# Altium PCB controller_V1.0.PcbDoc (part 5 of 8)
Units mm, origin at the board's own origin, x right, y up, seen from the top; angles counter-clockwise.
Board outline 284.13 x 175.13 mm, 4 copper layers (Top Layer, GND, VCC, Bottom Layer); 496 components, 415 nets, 1682 pads, 750 vias.
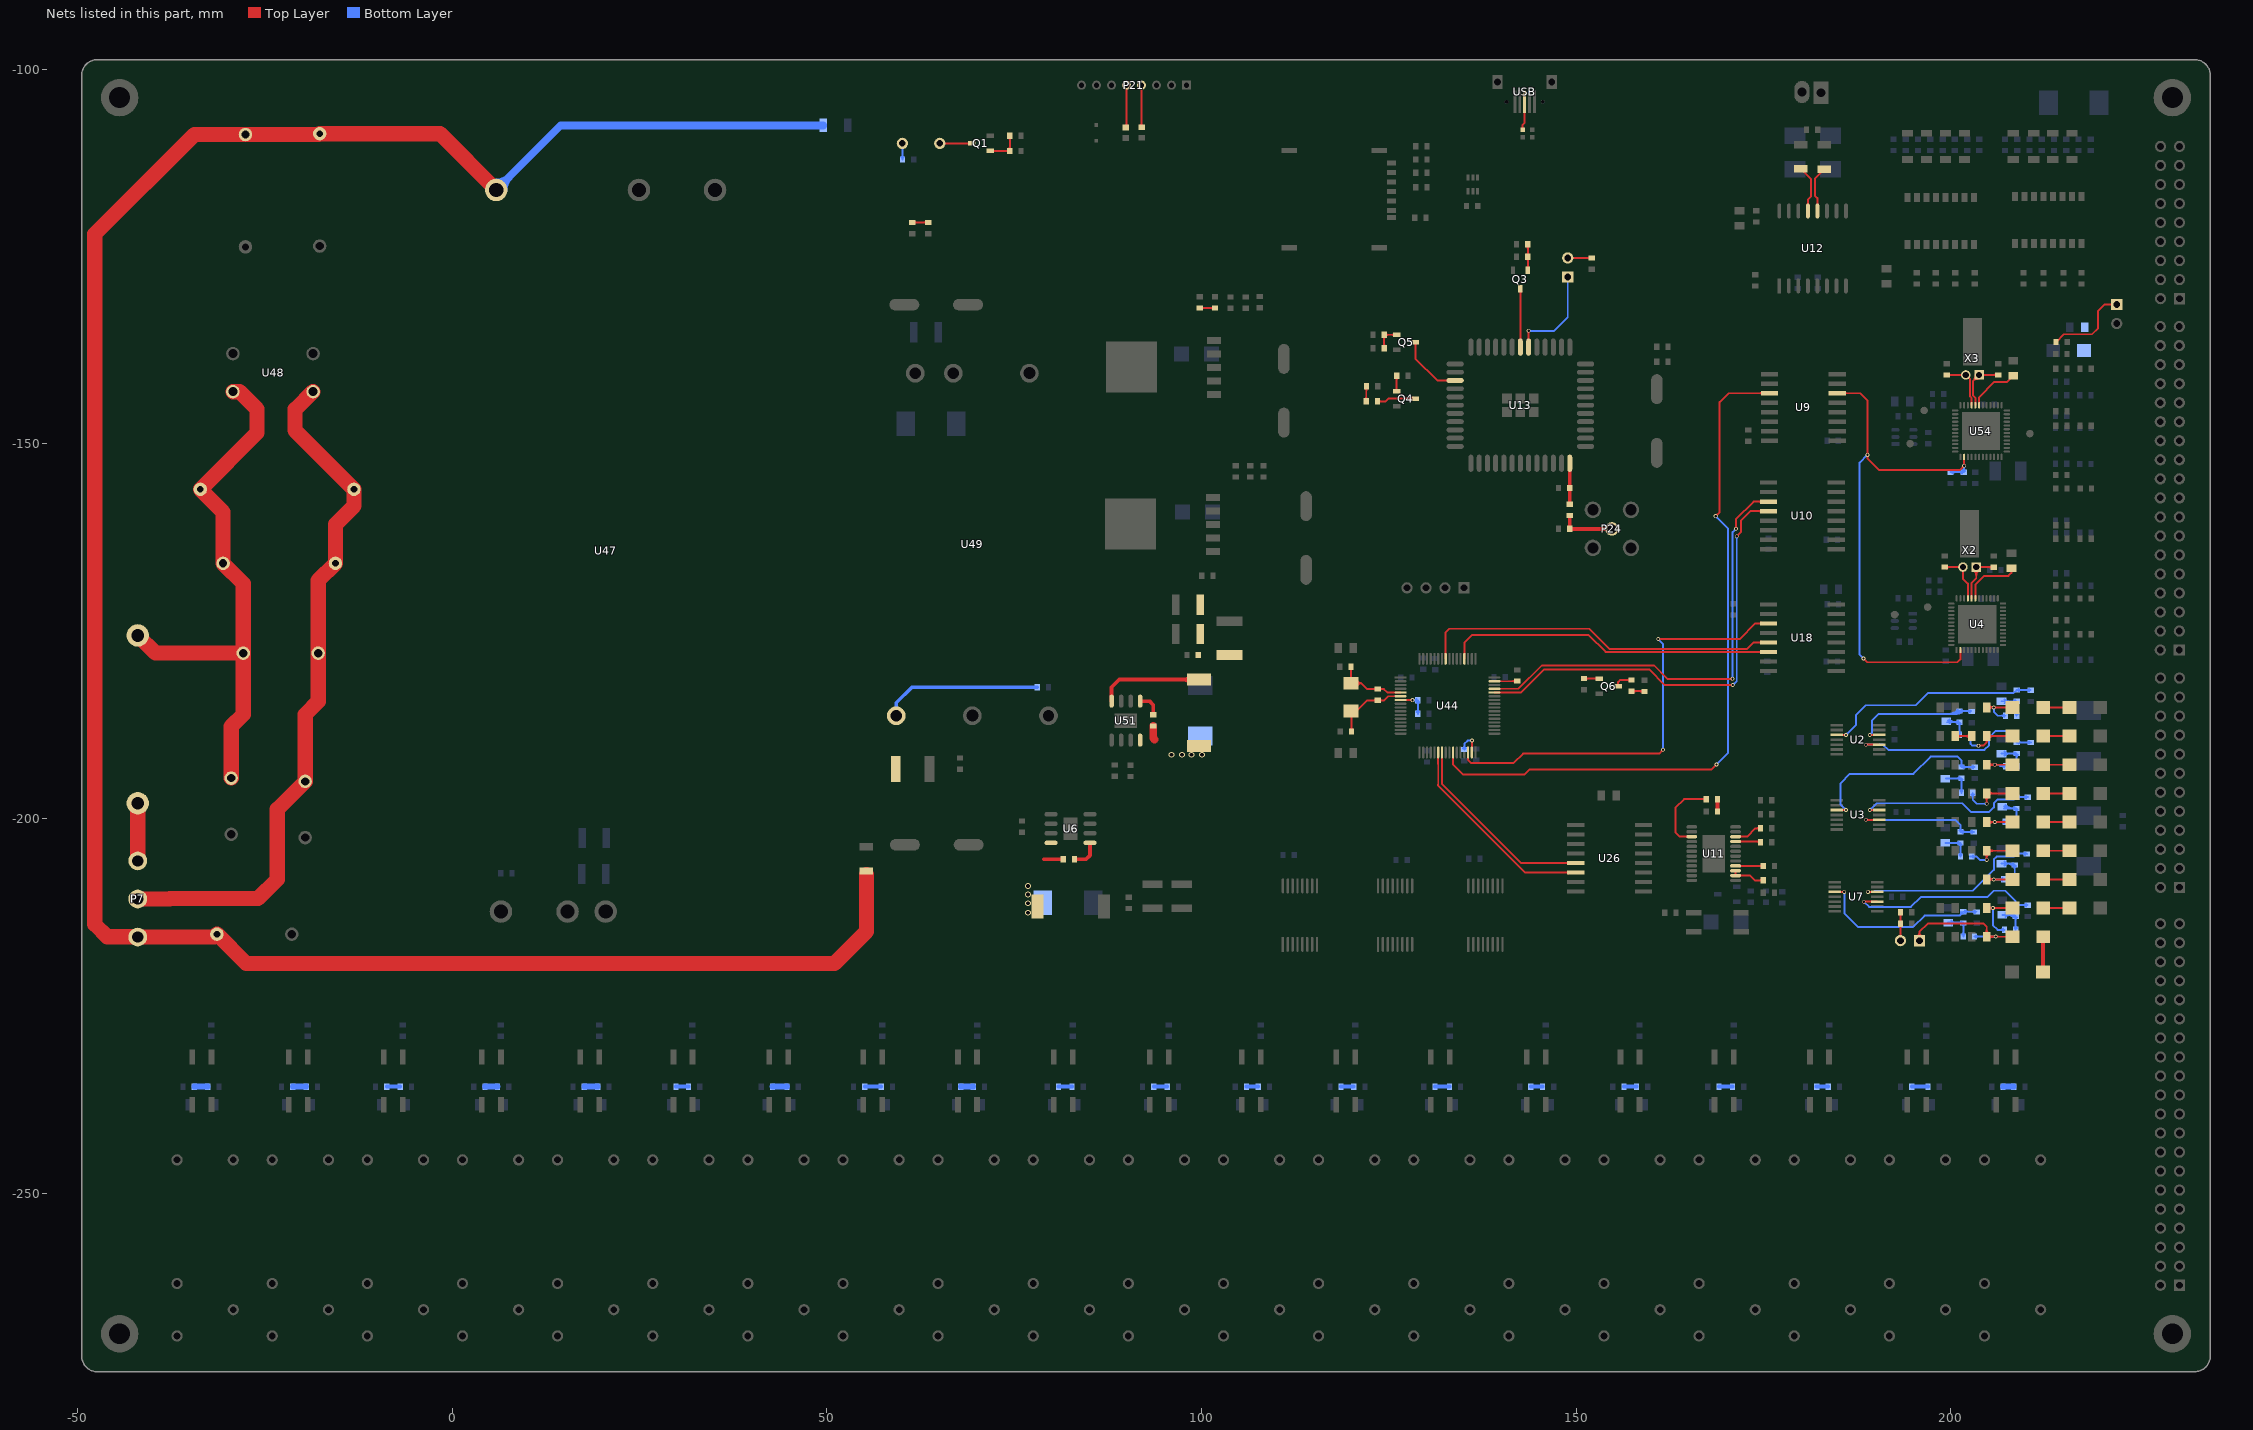
[diagram p7: the nets of this part, all layers, seen from the top]

## Via types
v1: diameter 0.508, hole 0.305, Top Layer to Bottom Layer, tented both sides, 596 vias
v2: diameter 1.016, hole 0.635, Top Layer to Bottom Layer, tented both sides, 65 vias
v3: diameter 0.6, hole 0.3, Top Layer to Bottom Layer, 50 vias
v4: diameter 0.762, hole 0.508, Top Layer to Bottom Layer, tented both sides, 29 vias
v5: diameter 2.032, hole 1.524, Top Layer to Bottom Layer, tented both sides, 4 vias
v6: diameter 3.048, hole 2.032, Top Layer to Bottom Layer, tented both sides, 3 vias
v7: diameter 1.5, hole 1, Top Layer to Bottom Layer, 2 vias
v8: diameter 2.54, hole 1.778, Top Layer to Bottom Layer, tented both sides, 1 vias

## Nets (pads, with @x,y where several pads share a name; then routed paths per layer and width w, separated by ;. In a path a pad name is that pad's centre, name@x,y a point inside that pad or via, vN(x,y) a via of type N, cw(c..) or ccw(c..) an arc to the next point about the centre after c; other vN are vias at no path point) (continued)
MIBSPI1MCS1: U18.3 U44.30 | length 61.1
  Top Layer w0.254: U44.30@135.591,-191.178 135.591,-192.208 135.966,-192.583 141.676,-192.583 142.92,-191.338 161.087,-191.338 v1(161.595,-190.83) ; v1(160.96,-176.047) 171.856,-176.047 173.939,-173.965 U18.3@175.689,-173.965 ; v1@161.05,-176.137 cw(c161.266,-176.354) 161.266,-176.047 cw(c161.266,-175.741) v1@161.05,-175.958 ; v1@161.468,-190.83 cw(c161.161,-190.83) 161.378,-191.047 cw(c161.595,-191.264) v1@161.595,-190.957 ; U18.3@174.705,-174.072 ccw(c174.445,-174.333) 174.445,-173.965 ccw(c174.445,-173.597) U18.3@174.705,-173.857
  Bottom Layer w0.254: v1@160.96,-176.174 cw(c160.96,-176.481) 161.177,-176.264 cw(c161.393,-176.047) v1@161.087,-176.047 ; v1(160.96,-176.047) 161.595,-176.682 v1(161.595,-190.83) ; v1@161.505,-190.74 ccw(c161.288,-190.524) 161.595,-190.524 ccw(c161.901,-190.524) v1@161.685,-190.74
MIBSPI1MCS2: U10.3 U44.45 | length 63.1
  Top Layer w0.254: U44.45@139.091,-182.678 142.315,-182.678 145.415,-179.578 159.283,-179.578 160.426,-179.578 162.204,-181.356 v1(170.891,-181.356) ; v1@170.801,-181.446 ccw(c170.585,-181.663) 170.585,-181.356 ccw(c170.585,-181.049) v1@170.801,-181.266 ; v1@171.259,-161.226 ccw(c171.042,-161.009) 171.348,-161.009 ccw(c171.655,-161.009) v1@171.438,-161.226 ; v1(171.348,-161.315) 171.348,-160.071 173.711,-157.709 U10.3@175.689,-157.709 ; U10.3@174.705,-157.816 ccw(c174.445,-158.077) 174.445,-157.709 ccw(c174.445,-157.341) U10.3@174.705,-157.601
  Bottom Layer w0.254: v1@170.801,-181.266 ccw(c170.585,-181.049) 170.891,-181.049 ccw(c171.198,-181.049) v1@170.981,-181.266 ; v1(170.891,-181.356) 170.891,-161.773 v1(171.348,-161.315) ; v1@171.221,-161.315 cw(c170.915,-161.315) 171.132,-161.532 cw(c171.348,-161.749) v1@171.348,-161.442
MIBSPI1MCS3: U10.4 U44.44 | length 63.1
  Top Layer w0.254: U44.44@139.091,-183.178 142.678,-183.178 145.771,-180.086 159.156,-180.086 159.741,-180.086 161.849,-182.194 v1(170.917,-182.194) ; v1@170.827,-182.284 ccw(c170.61,-182.501) 170.61,-182.194 ccw(c170.61,-181.888) v1@170.827,-182.104 ; v1(171.45,-162.331) 172.009,-161.773 172.009,-160.223 173.253,-158.979 U10.4@175.689,-158.979 ; v1@171.45,-162.204 ccw(c171.45,-161.898) 171.667,-162.115 ccw(c171.884,-162.331) v1@171.577,-162.331 ; U10.4@174.705,-159.086 ccw(c174.445,-159.347) 174.445,-158.979 ccw(c174.445,-158.611) U10.4@174.705,-158.871
  Bottom Layer w0.254: v1(170.917,-182.194) 171.45,-181.661 v1(171.45,-162.331) ; v1@170.917,-182.067 ccw(c170.917,-181.761) 171.133,-181.977 ccw(c171.35,-182.194) v1@171.044,-182.194 ; v1@171.36,-162.421 cw(c171.143,-162.638) 171.45,-162.638 cw(c171.757,-162.638) v1@171.54,-162.421
MIBSPI1SIMO: U18.5 U44.57 | length 48.9
  Top Layer w0.254: U44.57@132.591,-178.678 132.591,-175.638 132.591,-175.155 133.071,-174.676 151.765,-174.676 154.457,-177.368 172.822,-177.368 173.66,-176.53 ; 173.66,-176.505 U18.5@175.689,-176.505 ; U18.5@174.705,-176.612 ccw(c174.445,-176.873) 174.445,-176.505 ccw(c174.445,-176.137) U18.5@174.705,-176.397
MIBSPI1SOMI: U18.6 U44.52 | length 44.7
  Top Layer w0.254: U44.52@135.091,-178.678 135.091,-176.516 136.093,-175.514 151.689,-175.514 153.949,-177.775 161.874,-177.775 U18.6@175.689,-177.775 ; U18.6@174.705,-177.882 ccw(c174.445,-178.143) 174.445,-177.775 ccw(c174.445,-177.407) U18.6@174.705,-177.667
MISO_AO_MCU: U26.6 U44.22 | length 28.2
  Top Layer w0.254: U44.22@131.591,-191.178 131.591,-192.71 131.599,-192.718 131.599,-195.441 131.591,-195.449 131.591,-195.599 143.205,-207.213 U26.6@149.959,-207.213 ; U26.6@148.975,-207.321 ccw(c148.715,-207.581) 148.715,-207.213 ccw(c148.715,-206.845) U26.6@148.975,-207.105
MOSI_AO_MCU: U26.5 U44.23 | length 27
  Top Layer w0.254: U44.23@132.091,-191.178 132.091,-195.362 142.672,-205.943 145.669,-205.943 U26.5@149.959,-205.943 ; U26.5@148.975,-206.051 ccw(c148.715,-206.311) 148.715,-205.943 ccw(c148.715,-205.575) U26.5@148.975,-205.835
MSR0: D12.2 R7.2 R80.2 | length 9.5
  Top Layer w0.254: R80.2@204.816,-185.174 v1(205.765,-185.174) D12.2@208.259,-185.174 ; R80.2@205.08,-185.438 cw(c205.717,-186.075) 205.717,-185.174 cw(c205.717,-184.274) R80.2@205.08,-184.911 ; v1@205.676,-185.264 ccw(c205.459,-185.481) 205.459,-185.174 ccw(c205.459,-184.868) v1@205.676,-185.085 ; v1@205.855,-185.264 cw(c206.072,-185.481) 206.072,-185.174 cw(c206.072,-184.868) v1@205.855,-185.085
  Bottom Layer w0.254: v1@205.676,-185.264 cw(c205.459,-185.481) 205.765,-185.481 cw(c206.072,-185.481) v1@205.855,-185.264 ; v1(205.765,-185.174) 205.765,-185.776 206.273,-186.284 R7.2@207.313,-186.284 ; R7.2@207.156,-186.441 ccw(c206.775,-186.822) 206.775,-186.284 ccw(c206.775,-185.745) R7.2@207.156,-186.126
MSR1: D3.2 R5.2 R29.2 | length 12
  Top Layer w0.254: v1@203.606,-190.281 v1(203.733,-190.281) 204.368,-190.281 204.816,-189.833 ; v1@203.823,-190.37 cw(c204.04,-190.587) 204.04,-190.281 cw(c204.04,-189.974) v1@203.823,-190.191 ; R5.2@204.615,-189.464 cw(c204.379,-189.833) 204.816,-189.833 ; R5.2@205.018,-189.464 ccw(c205.254,-189.833) 204.816,-189.833 ; R5.2@205.08,-189.264 cw(c205.717,-189.901) 205.717,-189 cw(c205.717,-188.1) R5.2@205.08,-188.737 ; D3.2@208.259,-189 R5.2@204.816,-189 204.816,-189.833
  Bottom Layer w0.254: R29.2@202.536,-189.056 cw(c202.223,-189.369) 202.665,-189.369 ; 202.665,-189.505 cw(c203.299,-189.505) R29.2@202.851,-189.056 ; R29.2@202.665,-188.984 202.665,-190.042 202.904,-190.281 v1(203.733,-190.281) ; v1@203.644,-190.37 ccw(c203.427,-190.587) 203.427,-190.281 ccw(c203.427,-189.974) v1@203.644,-190.191
MSR2: D6.2 R1.2 R11.2 | length 8.6
  Top Layer w0.254: R11.2@204.816,-192.826 v1(205.892,-192.826) D6.2@208.259,-192.826 ; R11.2@205.08,-193.09 cw(c205.717,-193.727) 205.717,-192.826 cw(c205.717,-191.926) R11.2@205.08,-192.562 ; v1@205.803,-192.916 ccw(c205.586,-193.133) 205.586,-192.826 ccw(c205.586,-192.52) v1@205.803,-192.736 ; v1@205.982,-192.916 cw(c206.199,-193.133) 206.199,-192.826 cw(c206.199,-192.52) v1@205.982,-192.736
  Bottom Layer w0.254: v1(205.892,-192.826) 206.466,-192.826 206.654,-193.015 R1.2@207.313,-193.015 ; v1@205.982,-192.916 cw(c206.199,-193.133) 206.199,-192.826 cw(c206.199,-192.52) v1@205.982,-192.736 ; R1.2@207.156,-193.172 ccw(c206.775,-193.553) 206.775,-193.015 ccw(c206.775,-192.476) R1.2@207.156,-192.857
MSR3: D9.2 R13.2 R44.2 | length 12.5
  Top Layer w0.254: R13.2@204.553,-197.066 cw(c203.916,-197.703) 204.816,-197.703 cw(c205.717,-197.703) R13.2@205.08,-197.066 ; v1@204.727,-197.938 ccw(c204.51,-197.721) 204.816,-197.721 ccw(c205.123,-197.721) v1@204.906,-197.938 ; v1(204.816,-198.028) R13.2@204.816,-196.652 D9.2@208.259,-196.652 ; R13.2@205.08,-196.916 cw(c205.717,-197.553) 205.717,-196.652 cw(c205.717,-195.752) R13.2@205.08,-196.388
  Bottom Layer w0.254: R44.2@202.79,-196.803 cw(c202.409,-197.184) 202.947,-197.184 cw(c203.486,-197.184) R44.2@203.105,-196.803 ; R44.2@202.947,-196.571 202.947,-197.496 203.479,-198.028 v1(204.816,-198.028) ; v1@204.727,-198.117 ccw(c204.51,-198.334) 204.51,-198.028 ccw(c204.51,-197.721) v1@204.727,-197.938
MSR4: D11.2 R3.2 R17.2 | length 8.6
  Top Layer w0.254: R17.2@204.816,-200.478 v1(205.892,-200.478) D11.2@208.259,-200.478 ; R17.2@205.08,-200.742 cw(c205.717,-201.378) 205.717,-200.478 cw(c205.717,-199.577) R17.2@205.08,-200.214 ; v1@205.803,-200.568 ccw(c205.586,-200.785) 205.586,-200.478 ccw(c205.586,-200.171) v1@205.803,-200.388 ; v1@205.982,-200.568 cw(c206.199,-200.785) 206.199,-200.478 cw(c206.199,-200.171) v1@205.982,-200.388
  Bottom Layer w0.254: v1(205.892,-200.478) 207.222,-200.478 R3.2@207.285,-200.414 ; v1@205.982,-200.568 cw(c206.199,-200.785) 206.199,-200.478 cw(c206.199,-200.171) v1@205.982,-200.388 ; 206.719,-200.478 cw(c206.719,-201.056) R3.2@207.128,-200.647 ; 206.775,-200.478 ccw(c206.775,-199.979) R3.2@207.128,-200.332
MSR5: D14.2 R25.2 R27.2 | length 11.7
  Top Layer w0.254: R27.2@204.553,-204.718 cw(c203.916,-205.354) 204.816,-205.354 cw(c205.717,-205.354) R27.2@205.08,-204.718 ; v1@204.727,-205.431 ccw(c204.51,-205.214) 204.816,-205.214 ccw(c205.123,-205.214) v1@204.906,-205.431 ; v1(204.816,-205.521) R27.2@204.816,-204.304 D14.2@208.259,-204.304 ; R27.2@205.08,-204.568 cw(c205.717,-205.204) 205.717,-204.304 cw(c205.717,-203.403) R27.2@205.08,-204.04
  Bottom Layer w0.254: R25.2@202.566,-205.08 R25.2@202.82,-205.08 203.479,-205.08 203.92,-205.521 v1(204.816,-205.521) ; R25.2@202.978,-205.237 cw(c203.359,-205.618) 203.359,-205.08 cw(c203.359,-204.541) R25.2@202.978,-204.922 ; v1@204.727,-205.61 ccw(c204.51,-205.827) 204.51,-205.521 ccw(c204.51,-205.214) v1@204.727,-205.431
MSR6: D17.2 R32.2 R60.2 | length 8.4
  Top Layer w0.254: R32.2@204.816,-208.13 v1(205.765,-208.13) D17.2@208.259,-208.13 ; R32.2@205.08,-208.393 cw(c205.717,-209.03) 205.717,-208.13 cw(c205.717,-207.229) R32.2@205.08,-207.866 ; v1@205.676,-208.219 ccw(c205.459,-208.436) 205.459,-208.13 ccw(c205.459,-207.823) v1@205.676,-208.04 ; v1@205.855,-208.219 cw(c206.072,-208.436) 206.072,-208.13 cw(c206.072,-207.823) v1@205.855,-208.04
  Bottom Layer w0.254: v1@205.767,-208.128 R60.2@207.059,-208.128 ; v1@205.855,-208.219 cw(c206.077,-208.441) 206.077,-208.128 ; v1@205.855,-208.04 ccw(c206.067,-207.828) 206.067,-208.128 ; R60.2@206.902,-208.285 ccw(c206.521,-208.666) 206.521,-208.128 ccw(c206.521,-207.589) R60.2@206.902,-207.97
MSR7: D19.2 R34.2 R46.2 | length 11
  Top Layer w0.254: R34.2@204.816,-211.956 v1(205.638,-211.956) ; R34.2@205.097,-212.201 cw(c205.638,-212.675) v1(205.638,-211.956) ; R34.2@205.097,-211.71 ccw(c205.638,-211.236) v1(205.638,-211.956) ; v1@205.549,-212.045 ccw(c205.332,-212.262) 205.332,-211.956 ccw(c205.332,-211.649) v1@205.549,-211.866 ; v1@205.728,-212.045 cw(c205.945,-212.262) 205.945,-211.956 cw(c205.945,-211.649) v1@205.728,-211.866 ; D19.2@208.259,-211.956 v1(205.638,-211.956)
  Bottom Layer w0.254: v1@205.549,-212.045 cw(c205.332,-212.262) 205.638,-212.262 cw(c205.945,-212.262) v1@205.728,-212.045 ; v1(205.638,-211.956) 205.638,-214.224 206.273,-214.859 R46.2@207.186,-214.859 ; R46.2@207.029,-215.016 ccw(c206.648,-215.397) 206.648,-214.859 ccw(c206.648,-214.32) R46.2@207.029,-214.701
MSR8: D21.2 P2.1 R36.2 R62.2 | length 24.7
  Top Layer w0.254: P2.1@195.487,-215.789 ccw(c195.05,-215.138) 195.834,-215.138 ; P2.1@195.834,-216.306 195.834,-215.138 ; P2.1@196.181,-215.789 cw(c196.618,-215.138) 195.834,-215.138 ; R36.2@204.553,-215.368 ccw(c203.916,-214.731) 204.816,-214.731 ccw(c205.717,-214.731) R36.2@205.08,-215.368 ; R36.2@205.08,-216.045 cw(c205.717,-216.682) 205.717,-215.781 cw(c205.717,-214.881) R36.2@205.08,-215.518 ; 205.631,-215.781 ccw(c205.631,-215.359) v1@205.93,-215.658 ; v1@206.109,-215.658 ccw(c206.408,-215.359) 206.408,-215.781 ; D21.2@208.259,-215.781 R36.2@204.816,-215.781 204.816,-214.443 204.394,-214.02 196.952,-214.02 195.834,-215.138
  Bottom Layer w0.254: R62.2@203.201,-215.748 v1(206.019,-215.748) ; R62.2@203.359,-215.905 cw(c203.74,-216.286) 203.74,-215.748 cw(c203.74,-215.209) R62.2@203.359,-215.59 ; v1@205.93,-215.837 ccw(c205.713,-216.054) 205.713,-215.748 ccw(c205.713,-215.441) v1@205.93,-215.658
MSTART: R19.2 R189.2 U4.26 U9.6 U54.26 | length 79
  Top Layer w0.254: U9.6@184.859,-143.231 187.935,-143.231 188.9,-144.196 v1(188.9,-151.46) ; U9.6@185.843,-143.338 cw(c186.103,-143.599) 186.103,-143.231 cw(c186.103,-142.863) U9.6@185.843,-143.123 ; v1@188.366,-178.765 cw(c188.366,-179.072) 188.583,-178.855 cw(c188.8,-178.638) v1@188.493,-178.638 ; v1(188.366,-178.638) 188.874,-179.146 200.914,-179.146 201.295,-178.765 U4.26@201.295,-177.516 ; v1@188.81,-151.55 cw(c188.593,-151.767) 188.9,-151.767 cw(c189.206,-151.767) v1@188.99,-151.55 ; v1@188.81,-151.37 ccw(c188.593,-151.154) 188.9,-151.154 ccw(c189.206,-151.154) v1@188.99,-151.37 ; v1@188.925,-151.46 v1(188.9,-151.46) ; v1@201.676,-152.908 cw(c201.369,-152.908) 201.586,-153.125 cw(c201.803,-153.342) v1@201.803,-153.035 ; v1@201.713,-152.818 ccw(c201.496,-152.601) 201.803,-152.601 ccw(c202.11,-152.601) v1@201.893,-152.818 ; U54.26@201.803,-151.735 v1(201.803,-152.908) 201.219,-153.492 190.475,-153.492 188.9,-151.917 v1(188.9,-151.46)
  Bottom Layer w0.254: v1@188.239,-178.638 ccw(c187.933,-178.638) 188.15,-178.421 ccw(c188.366,-178.205) v1@188.366,-178.511 ; v1(188.366,-178.638) 187.858,-178.13 187.858,-152.502 v1(188.9,-151.46) ; v1@188.773,-151.46 cw(c188.466,-151.46) 188.683,-151.677 cw(c188.9,-151.894) v1@188.9,-151.587 ; R189.2@199.989,-153.77 R19.2@201.767,-153.77 v1@201.767,-152.944 ; R189.2@200.222,-153.928 cw(c200.602,-154.309) 200.602,-153.77 cw(c200.602,-153.232) R189.2@200.222,-153.613 ; R19.2@201.534,-153.928 ccw(c201.154,-154.309) 201.154,-153.77 ccw(c201.154,-153.232) R19.2@201.534,-153.613 ; R19.2@201.609,-153.613 ccw(c201.229,-153.232) 201.767,-153.232 ccw(c202.305,-153.232) R19.2@201.925,-153.613 ; 201.767,-153.302 cw(c202.197,-153.302) v1@201.893,-152.998
MSTART_MCU: U9.11 U44.26 | length 100.6
  Top Layer w0.254: U44.26@133.591,-191.178 133.591,-192.824 134.874,-194.107 143.154,-194.107 143.815,-193.446 161.417,-193.446 ; 163.347,-193.446 161.417,-193.446 ; 167.742,-193.446 166.548,-193.446 ; v1@168.631,-192.786 cw(c168.324,-192.786) 168.541,-193.003 cw(c168.758,-193.22) v1@168.758,-192.913 ; v1(168.631,-159.639) 169.164,-159.106 169.164,-144.424 170.358,-143.231 U9.11@175.816,-143.231 ; v1@168.631,-159.512 ccw(c168.631,-159.205) 168.847,-159.422 ccw(c169.064,-159.639) v1@168.758,-159.639 ; v1(168.758,-192.786) 168.097,-193.446 166.548,-193.446 ; U9.11@174.832,-143.338 ccw(c174.572,-143.599) 174.572,-143.231 ccw(c174.572,-142.863) U9.11@174.832,-143.123 ; 161.417,-193.446 166.548,-193.446
  Bottom Layer w0.254: v1@168.631,-159.766 cw(c168.631,-160.073) 168.847,-159.856 cw(c169.064,-159.639) v1@168.758,-159.639 ; v1(168.631,-159.639) 170.307,-161.315 170.307,-191.237 v1(168.758,-192.786) ; v1@168.758,-192.659 ccw(c168.758,-192.352) 168.974,-192.569 ccw(c169.191,-192.786) v1@168.885,-192.786
NetC3_1: C3.1 R1.1 R2.2 | length 7.7
  Bottom Layer w0.254: C3.1@206.788,-191.34 R2.2@208.813,-191.34 R1.1@208.813,-193.015 ; C3.1@207.195,-191.61 cw(c207.849,-192.264) 207.849,-191.34 ; C3.1@207.195,-191.083 ccw(c207.815,-190.463) 207.815,-191.34 ; R2.2@208.581,-191.497 ccw(c208.2,-191.878) 208.2,-191.34 ccw(c208.2,-190.801) R2.2@208.581,-191.182 ; R1.1@208.656,-192.782 ccw(c208.275,-192.401) 208.813,-192.401 ccw(c209.352,-192.401) R1.1@208.971,-192.782 ; R2.2@208.656,-191.497 cw(c208.275,-191.878) 208.813,-191.878 cw(c209.352,-191.878) R2.2@208.971,-191.497
NetC4_1: C4.1 R3.1 R4.2 | length 8
  Bottom Layer w0.254: C4.1@207.106,-198.65 R4.2@208.785,-198.65 R3.1@208.785,-200.414 ; C4.1@207.14,-198.366 ccw(c207.826,-197.68) 207.826,-198.65 ; C4.1@207.32,-198.186 ccw(c208.439,-197.067) R4.2@208.439,-198.65 ; R4.2@208.553,-198.808 ccw(c208.172,-199.189) 208.172,-198.65 ccw(c208.172,-198.112) R4.2@208.553,-198.493 ; R3.1@208.628,-200.182 ccw(c208.247,-199.801) 208.785,-199.801 ccw(c209.324,-199.801) R3.1@208.943,-200.182 ; R4.2@208.628,-198.808 cw(c208.247,-199.189) 208.785,-199.189 cw(c209.324,-199.189) R4.2@208.943,-198.808
NetC5_1: C5.1 R7.1 R8.2 | length 7.9
  Bottom Layer w0.254: C5.1@206.781,-184.353 R8.2@208.812,-184.353 ; C5.1@207.195,-184.617 cw(c207.832,-185.254) 207.832,-184.353 cw(c207.832,-183.453) C5.1@207.195,-184.089 ; 208.197,-184.353 cw(c208.197,-184.896) R8.2@208.581,-184.512 ; 208.203,-184.353 ccw(c208.203,-183.82) R8.2@208.581,-184.197 ; R7.1@208.656,-186.051 ccw(c208.275,-185.67) 208.813,-185.67 ccw(c209.352,-185.67) R7.1@208.971,-186.051 ; R8.2@208.656,-184.512 cw(c208.275,-184.893) 208.813,-184.893 cw(c209.352,-184.893) R8.2@208.971,-184.512 ; R7.1@208.813,-186.284 R8.2@208.813,-184.355
NetC6_2: C6.2 R2.1 U2.3 | length 30.4
  Top Layer w0.254: v1(188.666,-190.146) 188.67,-190.142 U2.3@190.447,-190.142 ; v1@188.756,-190.236 cw(c188.982,-190.462) 188.982,-190.142 ; v1@188.756,-190.056 ccw(c188.963,-189.849) 188.963,-190.142
  Bottom Layer w0.254: v1(188.666,-190.146) 190.959,-190.146 191.668,-190.856 204.495,-190.856 205.13,-190.221 205.13,-189.205 206.019,-188.316 208.178,-188.316 208.813,-188.951 R2.1@208.813,-189.84 210.694,-189.84 C6.2@210.718,-189.864 ; v1@188.756,-190.236 cw(c188.973,-190.453) 188.973,-190.146 cw(c188.973,-189.84) v1@188.756,-190.056 ; R2.1@208.656,-189.682 ccw(c208.275,-189.301) 208.813,-189.301 ccw(c209.352,-189.301) R2.1@208.971,-189.682 ; R2.1@209.046,-189.997 cw(c209.427,-190.378) 209.427,-189.84 cw(c209.427,-189.301) R2.1@209.046,-189.682 ; 210.047,-189.84 cw(c210.047,-190.46) C6.2@210.486,-190.021 ; 210.163,-189.84 ccw(c210.163,-189.383) C6.2@210.486,-189.706
NetC7_2: C7.2 R4.1 U3.5 | length 29
  Top Layer w0.254: v1(189.207,-198.875) U3.5@190.447,-198.875 ; v1@189.297,-198.965 cw(c189.514,-199.182) 189.514,-198.875 cw(c189.514,-198.569) v1@189.297,-198.786
  Bottom Layer w0.254: v1(189.207,-198.875) 190.115,-197.968 201.574,-197.968 202.717,-199.111 205.161,-199.111 205.765,-198.506 205.765,-197.968 206.273,-197.46 208.476,-197.46 R4.1@208.785,-197.15 C7.2@210.309,-197.15 ; v1@189.207,-198.748 ccw(c189.207,-198.442) 189.424,-198.659 ccw(c189.641,-198.875) v1@189.334,-198.875 ; 207.425,-197.46 ccw(c207.425,-195.865) R4.1@208.553,-196.993 ; 208.038,-197.46 ccw(c208.038,-196.478) R4.1@208.732,-197.172 ; R4.1@209.018,-197.308 cw(c209.399,-197.689) 209.399,-197.15 cw(c209.399,-196.612) R4.1@209.018,-196.993 ; C7.2@210.077,-197.308 ccw(c209.696,-197.689) 209.696,-197.15 ccw(c209.696,-196.612) C7.2@210.077,-196.993
NetC8_2: C8.2 R8.1 U2.10 | length 31.8
  Top Layer w0.254: U2.10@184.808,-188.842 v1(186.047,-188.842) ; v1@185.957,-188.932 ccw(c185.741,-189.149) 185.741,-188.842 ccw(c185.741,-188.536) v1@185.957,-188.753
  Bottom Layer w0.254: v1(186.047,-188.842) 187.35,-187.539 187.35,-186.187 188.651,-184.887 195.351,-184.887 197.002,-183.236 208.432,-183.236 R8.1@208.813,-182.855 C8.2@210.694,-182.855 ; v1@186.047,-188.715 ccw(c186.047,-188.409) 186.264,-188.626 ccw(c186.481,-188.842) v1@186.174,-188.842 ; R8.1@209.046,-183.012 cw(c209.427,-183.393) 209.427,-182.855 cw(c209.427,-182.316) R8.1@209.046,-182.697 ; 210.047,-182.855 cw(c210.047,-183.475) C8.2@210.486,-183.036 ; 210.163,-182.855 ccw(c210.163,-182.398) C8.2@210.486,-182.721
NetC12_1: C12.1 R25.1 R26.2 | length 6.3
  Bottom Layer w0.254: C12.1@199.337,-203.278 R26.2@201.32,-203.278 R25.1@201.32,-205.08 ; R26.2@201.088,-203.435 ccw(c200.707,-203.816) 200.707,-203.278 ccw(c200.707,-202.739) R26.2@201.088,-203.12 ; R25.1@201.163,-204.847 ccw(c200.782,-204.466) 201.32,-204.466 ccw(c201.859,-204.466) R25.1@201.478,-204.847 ; R26.2@201.163,-203.435 cw(c200.782,-203.816) 201.32,-203.816 cw(c201.859,-203.816) R26.2@201.478,-203.435
NetC13_1: C13.1 R29.1 R30.2 | length 7.8
  Bottom Layer w0.254: C13.1@199.533,-187.149 R30.2@201.193,-187.149 R29.1@201.193,-188.824 ; C13.1@199.647,-186.944 ccw(c200.14,-186.452) 200.14,-187.149 ; C13.1@199.827,-187.292 cw(c200.174,-187.639) 200.174,-187.149 ; C13.1@199.827,-186.765 ccw(c200.753,-185.838) 200.753,-187.149 ; R30.2@200.961,-187.306 ccw(c200.58,-187.687) 200.58,-187.149 ccw(c200.58,-186.61) R30.2@200.961,-186.991 ; R29.1@201.036,-188.591 ccw(c200.655,-188.21) 201.193,-188.21 ccw(c201.732,-188.21) R29.1@201.351,-188.591 ; R30.2@201.036,-187.306 cw(c200.655,-187.687) 201.193,-187.687 cw(c201.732,-187.687) R30.2@201.351,-187.306
NetC16_2: C16.2 R26.1 U3.3 | length 20.9
  Top Layer w0.254: v1(188.666,-200.179) 188.67,-200.175 U3.3@190.447,-200.175 ; v1@188.756,-200.269 cw(c188.982,-200.495) 188.982,-200.175 ; v1@188.756,-200.089 ccw(c188.963,-199.882) 188.963,-200.175
  Bottom Layer w0.254: v1(188.666,-200.179) 200.611,-200.179 201.32,-200.889 R26.1@201.32,-201.778 203.074,-201.778 C16.2@203.098,-201.802 ; v1@188.756,-200.269 cw(c188.973,-200.486) 188.973,-200.179 cw(c188.973,-199.873) v1@188.756,-200.089 ; R26.1@201.163,-201.62 ccw(c200.782,-201.239) 201.32,-201.239 ccw(c201.859,-201.239) R26.1@201.478,-201.62 ; R26.1@201.553,-201.935 cw(c201.934,-202.316) 201.934,-201.778 cw(c201.934,-201.239) R26.1@201.553,-201.62 ; 202.427,-201.778 cw(c202.427,-202.398) C16.2@202.866,-201.959 ; 202.543,-201.778 ccw(c202.543,-201.321) C16.2@202.866,-201.644
NetC17_2: C17.2 R30.1 U2.5 | length 22.6
  Top Layer w0.254: v1(189.207,-188.842) U2.5@190.447,-188.842 ; v1@189.297,-188.932 cw(c189.514,-189.149) 189.514,-188.842 cw(c189.514,-188.536) v1@189.297,-188.753
  Bottom Layer w0.254: v1(189.207,-188.842) 189.509,-188.54 189.509,-186.919 190.398,-186.03 200.812,-186.03 R30.1@201.193,-185.649 C17.2@202.736,-185.649 ; v1@189.207,-188.715 ccw(c189.207,-188.409) 189.424,-188.626 ccw(c189.641,-188.842) v1@189.334,-188.842 ; 199.66,-186.03 ccw(c199.66,-184.19) R30.1@200.961,-185.491 ; 200.273,-186.03 ccw(c200.273,-184.804) R30.1@201.14,-185.671 ; 200.887,-186.03 ccw(c200.887,-185.417) R30.1@201.32,-185.85 ; R30.1@201.426,-185.806 cw(c201.807,-186.187) 201.807,-185.649 cw(c201.807,-185.11) R30.1@201.426,-185.491 ; 202.01,-185.649 cw(c202.01,-186.46) C17.2@202.584,-185.886 ; C17.2@202.396,-185.649 ccw(c202.396,-185.383) C17.2@202.584,-185.571
NetC21_1: C21.1 R44.1 R45.2 | length 6.5
  Bottom Layer w0.254: C21.1@199.366,-194.642 R45.2@201.447,-194.642 R44.1@201.447,-196.571 ; R45.2@201.215,-194.799 ccw(c200.834,-195.18) 200.834,-194.642 ccw(c200.834,-194.103) R45.2@201.215,-194.484 ; R44.1@201.29,-196.338 ccw(c200.909,-195.957) 201.447,-195.957 ccw(c201.986,-195.957) R44.1@201.605,-196.338 ; R45.2@201.29,-194.799 cw(c200.909,-195.18) 201.447,-195.18 cw(c201.986,-195.18) R45.2@201.605,-194.799
NetC22_1: C22.1 R46.1 R47.2 | length 7.8
  Bottom Layer w0.254: C22.1@206.906,-212.881 R47.2@208.51,-212.881 ; C22.1@207.32,-213.144 cw(c207.956,-213.781) 207.956,-212.881 cw(c207.956,-211.98) C22.1@207.32,-212.617 ; 207.648,-212.881 cw(c207.648,-214.02) R47.2@208.454,-213.214 ; 208.261,-212.881 cw(c208.261,-213.407) R47.2@208.633,-213.035 ; R46.1@208.529,-214.626 ccw(c208.148,-214.245) 208.686,-214.245 ccw(c209.225,-214.245) R46.1@208.844,-214.626 ; R47.2@208.529,-213.214 cw(c208.148,-213.595) 208.686,-213.595 cw(c209.225,-213.595) R47.2@208.844,-213.214 ; R46.1@208.686,-214.859 R47.2@208.686,-213.057
NetC25_2: C25.2 R45.1 U3.10 | length 29.1
  Top Layer w0.254: U3.10@184.808,-198.875 v1(186.047,-198.875) ; v1@185.957,-198.965 ccw(c185.741,-199.182) 185.741,-198.875 ccw(c185.741,-198.569) v1@185.957,-198.786
  Bottom Layer w0.254: v1@185.92,-198.875 ccw(c185.614,-198.875) 185.83,-198.659 ccw(c186.047,-198.442) v1@186.047,-198.748 ; v1(186.047,-198.875) 185.318,-198.147 185.318,-195.301 186.563,-194.056 195.021,-194.056 197.333,-191.745 197.993,-191.745 200.939,-191.745 201.447,-192.253 R45.1@201.447,-193.142 C25.2@203.201,-193.142 ; R45.1@201.29,-192.984 ccw(c200.909,-192.603) 201.447,-192.603 ccw(c201.986,-192.603) R45.1@201.605,-192.984 ; R45.1@201.68,-193.299 cw(c202.061,-193.68) 202.061,-193.142 cw(c202.061,-192.603) R45.1@201.68,-192.984 ; 202.554,-193.142 cw(c202.554,-193.762) C25.2@202.993,-193.323 ; 202.67,-193.142 ccw(c202.67,-192.685) C25.2@202.993,-193.008
NetC26_2: C26.2 R47.1 U7.3 | length 29.4
  Top Layer w0.254: v1(188.412,-211.101) 188.416,-211.097 U7.3@190.193,-211.097 ; v1@188.502,-211.191 cw(c188.728,-211.417) 188.728,-211.097 ; v1@188.502,-211.011 ccw(c188.709,-210.804) 188.709,-211.097
  Bottom Layer w0.254: v1@188.412,-211.228 cw(c188.412,-211.535) 188.629,-211.318 cw(c188.846,-211.101) v1@188.539,-211.101 ; v1(188.412,-211.101) 189.121,-211.811 193.964,-211.811 194.701,-211.811 196.012,-210.5 204.917,-210.5 205.765,-209.652 207.289,-209.652 208.686,-211.049 ; R47.1@208.535,-211.392 ccw(c208.219,-211.049) 208.686,-211.049 ; R47.1@208.837,-211.392 cw(c209.153,-211.049) 208.686,-211.049 ; R47.1@208.919,-211.714 cw(c209.3,-212.095) 209.3,-211.557 cw(c209.3,-211.018) R47.1@208.919,-211.399 ; 209.638,-211.557 cw(c209.638,-212.177) C26.2@210.077,-211.738 ; 209.754,-211.557 ccw(c209.754,-211.1) C26.2@210.077,-211.423 ; C26.2@210.285,-211.557 R47.1@208.686,-211.557 208.686,-211.049
NetC29_1: C29.1 R60.1 R61.2 | length 8.2
  Bottom Layer w0.254: C29.1@206.779,-206.023 208.383,-206.023 R61.2@208.559,-206.199 R60.1@208.559,-208.128 ; C29.1@207.193,-206.286 cw(c207.829,-206.923) 207.829,-206.023 cw(c207.829,-205.122) C29.1@207.193,-205.759 ; 207.521,-206.023 cw(c207.521,-207.162) R61.2@208.327,-206.356 ; 208.134,-206.023 cw(c208.134,-206.549) R61.2@208.506,-206.177 ; R60.1@208.402,-207.895 ccw(c208.021,-207.514) 208.559,-207.514 ccw(c209.098,-207.514) R60.1@208.717,-207.895 ; R61.2@208.402,-206.356 cw(c208.021,-206.737) 208.559,-206.737 cw(c209.098,-206.737) R61.2@208.717,-206.356
NetC30_1: C30.1 R62.1 R63.2 | length 7.7
  Bottom Layer w0.254: C30.1@199.669,-213.897 R63.2@201.652,-213.897 ; C30.1@200.083,-214.16 cw(c200.72,-214.797) 200.72,-213.897 cw(c200.72,-212.996) C30.1@200.083,-213.633 ; 200.97,-213.897 cw(c200.97,-214.602) R63.2@201.469,-214.103 ; 201.206,-213.897 ccw(c201.206,-213.526) R63.2@201.469,-213.788 ; R62.1@201.544,-215.515 ccw(c201.163,-215.134) 201.701,-215.134 ccw(c202.24,-215.134) R62.1@201.859,-215.515 ; R63.2@201.544,-214.103 cw(c201.163,-214.484) 201.701,-214.484 cw(c202.24,-214.484) R63.2@201.859,-214.103 ; R62.1@201.701,-215.748 R63.2@201.701,-213.946
NetC33_2: C33.2 R61.1 U7.5 | length 31.6
  Top Layer w0.254: v1(188.953,-209.797) U7.5@190.193,-209.797 ; v1@189.043,-209.887 cw(c189.26,-210.104) 189.26,-209.797 cw(c189.26,-209.491) v1@189.043,-209.708
  Bottom Layer w0.254: v1(188.953,-209.797) 189.745,-209.797 189.89,-209.652 192.176,-209.652 ; v1@189.043,-209.887 cw(c189.26,-210.104) 189.26,-209.797 cw(c189.26,-209.491) v1@189.043,-209.708 ; 191.541,-209.652 192.176,-209.652 ; 207.026,-205.08 ccw(c207.026,-203.24) R61.1@208.327,-204.541 ; 207.639,-205.08 ccw(c207.639,-203.854) R61.1@208.506,-204.721 ; 208.253,-205.08 ccw(c208.253,-204.467) R61.1@208.686,-204.9 ; R61.1@208.792,-204.856 cw(c209.173,-205.237) 209.173,-204.699 cw(c209.173,-204.16) R61.1@208.792,-204.541 ; 209.511,-204.699 cw(c209.511,-205.319) C33.2@209.95,-204.88 ; 209.627,-204.699 ccw(c209.627,-204.242) C33.2@209.95,-204.565 ; C33.2@210.182,-204.723 210.158,-204.699 R61.1@208.559,-204.699 208.178,-205.08 206.146,-205.08 205.765,-205.461 205.765,-206.858 202.971,-209.652 192.176,-209.652
NetC34_2: C34.2 R63.1 U7.10 | length 26.8
  Top Layer w0.254: U7.10@184.554,-209.797 v1(185.808,-209.797) ; v1@185.718,-209.887 ccw(c185.501,-210.104) 185.501,-209.797 ccw(c185.501,-209.491) v1@185.718,-209.708
  Bottom Layer w0.254: v1@185.718,-209.887 cw(c185.501,-210.104) 185.808,-210.104 cw(c186.114,-210.104) v1@185.897,-209.887 ; v1(185.808,-209.797) 185.808,-212.681 187.604,-214.478 194.996,-214.478 196.52,-212.954 201.193,-212.954 R63.1@201.701,-212.446 C34.2@203.455,-212.446 ; 201.231,-212.916 ccw(c200.811,-212.496) R63.1@201.404,-212.459 ; R63.1@201.374,-212.773 cw(c201.626,-213.026) R63.1@201.626,-212.669 ; R63.1@201.934,-212.603 cw(c202.315,-212.984) 202.315,-212.446 cw(c202.315,-211.907) R63.1@201.934,-212.288 ; 202.808,-212.446 cw(c202.808,-213.066) C34.2@203.247,-212.627 ; 202.924,-212.446 ccw(c202.924,-211.989) C34.2@203.247,-212.312
NetC35_1: C35.1 U11.21 | length 4.6
  Top Layer w0.254: U11.21@171.299,-203.074 174.52,-203.074 C35.1@174.621,-203.175 ; U11.21@171.868,-203.143 cw(c172.036,-203.31) 172.036,-203.074 cw(c172.036,-202.837) U11.21@171.868,-203.004 ; 174.02,-203.074 cw(c174.02,-203.701) C35.1@174.463,-203.257 ; 174.145,-203.074 ccw(c174.145,-202.624) C35.1@174.463,-202.942
NetC38_1: C38.1 U11.16 | length 4.9
  Top Layer w0.254: U11.16@171.299,-206.324 C38.1@174.952,-206.324 ; U11.16@171.868,-206.393 cw(c172.036,-206.56) 172.036,-206.324 cw(c172.036,-206.087) U11.16@171.868,-206.254 ; 174.377,-206.324 cw(c174.377,-206.951) C38.1@174.82,-206.507 ; 174.502,-206.324 ccw(c174.502,-205.874) C38.1@174.82,-206.192
NetC39_1: C39.1 U11.14 U11.15 | length 6.6
  Top Layer w0.254: U11.14@171.23,-207.554 ccw(c171.062,-207.387) 171.299,-207.387 ccw(c171.536,-207.387) U11.14@171.368,-207.554 ; U11.15@171.23,-207.043 cw(c171.062,-207.21) 171.299,-207.21 cw(c171.536,-207.21) U11.15@171.368,-207.043 ; U11.15@171.299,-206.974 U11.14@171.299,-207.624 173.232,-207.624 173.863,-208.255 C39.1@174.978,-208.255 ; U11.14@171.868,-207.693 cw(c172.036,-207.86) 172.036,-207.624 cw(c172.036,-207.387) U11.14@171.868,-207.554 ; C39.1@174.82,-208.412 ccw(c174.44,-208.793) 174.44,-208.255 ccw(c174.44,-207.716) C39.1@174.82,-208.097
NetC41_2: C41.2 R64.1 U44.6 Y1.2 | length 12.7
  Top Layer w0.254: C41.2@119.859,-188.159 ccw(c119.478,-187.778) 120.016,-187.778 ccw(c120.555,-187.778) C41.2@120.174,-188.159 ; Y1.2@119.987,-185.64 120.709,-185.64 122.123,-184.226 R64.1@123.543,-184.226 124.384,-184.226 124.932,-183.678 U44.6@126.591,-183.678 ; C41.2@120.016,-188.392 Y1.2@120.016,-185.67 ; R64.1@123.31,-184.384 ccw(c122.93,-184.765) 122.93,-184.226 ccw(c122.93,-183.688) R64.1@123.31,-184.069 ; R64.1@123.776,-184.384 cw(c124.156,-184.765) 124.156,-184.226 cw(c124.156,-183.688) R64.1@123.776,-184.069
NetC43_1: C43.1 U4.7 | length 8.7
  Top Layer w0.254: U4.7@203.295,-170.616 203.295,-168.815 204.495,-167.615 207.721,-167.615 208.117,-167.219 ; C43.1@207.931,-166.896 cw(c207.745,-167.219) 208.117,-167.219 ; C43.1@208.117,-166.573 208.117,-167.219 ; C43.1@208.303,-166.896 ccw(c208.489,-167.219) 208.117,-167.219
NetC48_1: C48.1 U4.9 X2.1 | length 7.7
  Top Layer w0.254: C48.1@199.227,-166.446 X2.1@201.64,-166.446 201.64,-167.985 202.295,-168.64 U4.9@202.295,-170.616 ; C48.1@199.46,-166.604 cw(c199.84,-166.985) 199.84,-166.446 cw(c199.84,-165.908) C48.1@199.46,-166.289
NetC59_1: C59.1 U4.8 X2.2 | length 9.7
  Top Layer w0.254: U4.8@202.795,-170.616 202.795,-168.553 203.418,-167.93 X2.2@203.418,-166.446 ; X2.2@203.059,-166.805 cw(c202.192,-167.673) 203.418,-167.673 cw(c204.644,-167.673) X2.2@203.777,-166.805 ; X2.2@203.545,-166.573 X2.2@203.418,-166.446 ; 205.091,-166.446 cw(c205.091,-167.071) C59.1@205.533,-166.629 ; 205.213,-166.446 ccw(c205.213,-165.995) C59.1@205.533,-166.314 ; C59.1@205.765,-166.472 205.74,-166.446 X2.2@203.418,-166.446
NetC62_2: C62.2 C129.1 C131.2 C132.2 P7.3 R177.1 U47.3 | length 320.7
  Top Layer w0.762: C62.2@55.268,-207.493 C62.2@55.268,-207.009
  Top Layer w2.032: P7.3@-41.986,-215.824 -31.803,-215.824 R177.1@-31.422,-215.443 -27.511,-219.354 51.003,-219.354 55.268,-215.09 C62.2@55.268,-207.493 ; P7.3@-41.986,-215.798 -46.05,-215.798 -47.727,-214.122 -47.727,-121.996 -34.428,-108.698 C131.2@-27.612,-108.698 -17.819,-108.698 C129.1@-17.706,-108.585 -1.654,-108.585 U47.3@5.865,-116.103
  Bottom Layer w1.016: U47.3@5.865,-116.103 14.475,-107.493 C132.2@49.506,-107.493 ; U47.3@5.865,-115.111 ccw(c5.865,-112.717) 7.558,-114.41 ccw(c9.252,-116.103) U47.3@6.857,-116.103
NetC87_2: C87.2 R123.1 | length 1.9
  Bottom Layer w0.762: R123.1@42.747,-235.788 C87.2@44.676,-235.788
NetC88_2: C88.2 R125.1 | length 1.5
  Bottom Layer w0.508: R125.1@182.114,-235.788 C88.2@183.662,-235.788
NetC89_2: C89.2 R126.1 | length 1.7
  Bottom Layer w0.508: R126.1@29.841,-235.788 C89.2@31.516,-235.788
NetC90_2: C90.2 R122.1 | length 1.4
  Bottom Layer w0.762: R122.1@206.998,-235.788 C90.2@208.419,-235.788
NetC91_2: C91.2 R129.1 | length 2.2
  Bottom Layer w0.508: R129.1@194.814,-235.788 C91.2@196.997,-235.788
NetC92_2: C92.2 R130.1 | length 1.8
  Bottom Layer w0.762: R130.1@17.624,-235.788 C92.2@19.426,-235.788
NetC93_2: C93.2 R133.1 | length 1.8
  Bottom Layer w0.508: R133.1@169.086,-235.788 C93.2@170.888,-235.788
NetC94_2: C94.2 R134.1 | length 1.7
  Bottom Layer w0.762: R134.1@4.365,-235.788 C94.2@6.04,-235.788
NetC95_2: C95.2 R137.1 | length 1.7
  Bottom Layer w0.508: R137.1@156.384,-235.788 C95.2@158.059,-235.788
NetC96_1: C96.1 U11.22 | length 5
  Top Layer w0.254: U11.22@171.299,-202.424 172.836,-202.424 173.948,-201.312 C96.1@174.621,-201.312 ; U11.22@171.868,-202.493 cw(c172.036,-202.66) 172.036,-202.424 cw(c172.036,-202.187) U11.22@171.868,-202.354 ; C96.1@174.463,-201.47 ccw(c174.083,-201.85) 174.083,-201.312 ccw(c174.083,-200.774) C96.1@174.463,-201.154
NetC97_2: C97.2 R138.1 | length 1.8
  Bottom Layer w0.508: R138.1@-8.765,-235.788 C97.2@-6.963,-235.788
NetC98_2: C98.2 R141.1 | length 1.5
  Bottom Layer w0.508: R141.1@143.969,-235.788 C98.2@145.517,-235.788
NetC101_2: C101.2 R143.1 | length 1.8
  Bottom Layer w0.762: R143.1@-21.314,-235.788 C101.2@-19.512,-235.788
NetC102_2: C102.2 R145.1 | length 1.9
  Bottom Layer w0.508: R145.1@131.162,-235.788 C102.2@133.091,-235.788
NetC103_2: C103.2 R146.1 | length 1.8
  Bottom Layer w0.762: R146.1@-34.445,-235.788 C103.2@-32.643,-235.788
NetC104_2: C104.2 R149.1 | length 1.7
  Bottom Layer w0.508: R149.1@118.64,-235.788 C104.2@120.315,-235.788
NetC106_2: C106.2 R151.1 | length 1.5
  Bottom Layer w0.508: R151.1@106.016,-235.788 C106.2@107.564,-235.788
NetC107_2: C107.2 R153.1 | length 1.8
  Bottom Layer w0.508: R153.1@93.621,-235.788 C107.2@95.423,-235.788
NetC109_2: C109.2 R155.1 | length 1.8
  Bottom Layer w0.508: R155.1@80.921,-235.788 C109.2@82.723,-235.788
NetC110_2: C110.2 R157.1 | length 1.7
  Bottom Layer w0.762: R157.1@67.865,-235.788 C110.2@69.54,-235.788
NetC111_2: C111.2 R159.1 | length 2.2
  Bottom Layer w0.508: R159.1@55.064,-235.788 C111.2@57.247,-235.788
NetC116_1: C116.1 R40.1 U13.35 | length 5.5
  Top Layer w0.508: R40.1@149.146,-158.039 149.168,-158.017 U13.35@149.168,-152.581
NetC117_1: C117.1 P24.1 R40.2 | length 7.4
  Top Layer w0.508: R40.2@149.146,-159.539 149.146,-161.338 C117.1@149.149,-161.341 P24.1@154.788,-161.341
NetC118_2: C118.2 R64.2 U44.5 Y1.1 | length 13.2
  Top Layer w0.254: C118.2@119.808,-179.988 cw(c119.427,-180.369) 119.966,-180.369 cw(c120.504,-180.369) C118.2@120.123,-179.988 ; C118.2@119.966,-179.756 119.966,-181.919 Y1.1@119.987,-181.94 121.333,-181.94 ; Y1.1@120.777,-182.276 cw(c121.333,-182.568) 121.333,-181.94 ; Y1.1@120.777,-181.604 ccw(c121.333,-181.313) 121.333,-181.94 ; R64.2@123.31,-182.884 ccw(c122.93,-183.265) 122.93,-182.726 ccw(c122.93,-182.188) R64.2@123.31,-182.569 ; R64.2@123.776,-182.884 cw(c124.156,-183.265) 124.156,-182.726 cw(c124.156,-182.188) R64.2@123.776,-182.569 ; U44.5@126.591,-183.178 124.809,-183.178 124.357,-182.726 R64.2@123.543,-182.726 122.119,-182.726 121.333,-181.94
NetC119_2: C119.2 U44.31 | length 5.2
  Top Layer w0.254: U44.31@136.091,-191.178 v1@136.091,-189.583 ; 136.091,-189.966 cw(c136.492,-189.966) v1@136.208,-189.683
  Bottom Layer w0.254: C119.2@134.933,-190.634 ccw(c134.553,-190.253) 135.091,-190.253 ccw(c135.629,-190.253) C119.2@135.249,-190.634 ; C119.2@135.091,-190.792 135.091,-190.029 135.527,-189.593 v1(136.119,-189.593) ; v1@136.029,-189.683 ccw(c135.812,-189.9) 135.812,-189.593 ccw(c135.812,-189.287) v1@136.029,-189.503
NetC120_2: C120.2 R168.1 U44.7 | length 7.2
  Top Layer w0.254: U44.7@126.591,-184.178 v1@128.173,-184.178 ; 127.815,-184.178 cw(c127.815,-184.562) v1@128.086,-184.291
  Bottom Layer w0.254: v1(128.176,-184.201) 128.201,-184.226 R168.1@128.877,-184.226 C120.2@128.878,-186.03 ; v1@128.266,-184.111 ccw(c128.544,-183.833) R168.1@128.544,-184.226 ; R168.1@128.719,-184.459 cw(c128.339,-184.84) 128.877,-184.84 cw(c129.415,-184.84) R168.1@129.035,-184.459 ; R168.1@128.719,-184.384 ccw(c128.339,-184.765) 128.339,-184.226 ccw(c128.339,-183.688) R168.1@128.719,-184.069 ; C120.2@128.721,-185.797 ccw(c128.343,-185.419) 128.877,-185.419 ; 128.877,-185.413 ccw(c129.419,-185.413) C120.2@129.036,-185.797
NetC122_2: C122.2 U44.47 | length 3.9
  Top Layer w0.254: U44.47@139.091,-181.678 C122.2@142.148,-181.678 ; 141.512,-181.678 ccw(c141.512,-181.085) C122.2@141.931,-181.505 ; 141.589,-181.678 cw(c141.589,-182.162) C122.2@141.931,-181.82
NetC130_1: C130.1 P7.2 R174.2 R175.1 R176.1 U48.3 | length 93.4
  Top Layer w2.032: P7.2@-41.986,-210.744 -37.77,-210.744 -37.719,-210.693 -25.936,-210.693 -23.371,-208.128 -23.371,-198.78 R176.1@-19.637,-195.047 -19.637,-186.106 -17.91,-184.379 R175.1@-17.91,-177.927 -17.91,-168.25 C130.1@-15.598,-165.938 -15.598,-160.731 -13.132,-158.265 R174.2@-13.132,-156.058 -21.008,-148.181 -21.008,-145.345 -20.904,-145.345 U48.3@-18.586,-143.027
NetC130_2: C130.2 F3.2 R173.2 R174.1 R175.2 U48.4 | length 74.6
  Top Layer w2.032: F3.2@-41.989,-175.568 -39.629,-177.927 R175.2@-27.91,-177.927 ; R173.2@-29.517,-194.608 -29.517,-187.734 -27.91,-186.126 R175.2@-27.91,-177.927 ; U48.4@-29.286,-143.027 -28.406,-143.027 -26.088,-145.345 -26.088,-148.514 R174.1@-33.632,-156.058 -30.598,-159.092 C130.2@-30.598,-165.938 -27.91,-168.627 R175.2@-27.91,-177.927
NetC137_1: C137.1 D4.2 L3.1 U6.8 | length 2.6
  Top Layer w0.508: 78.966,-205.435 C137.1@81.557,-205.435
  other v4: 76.832,-212.573 76.832,-211.303 76.832,-210.16 76.832,-209.017
NetC137_2: C137.2 U6.1 | length 3.9
  Top Layer w0.508: C137.2@83.057,-205.435 84.605,-205.435 85.122,-204.918 U6.1@85.122,-203.251
NetC139_1: C139.1 D70.2 L1.1 U51.8 | length 1.9
  Top Layer w1.016: C139.1@93.571,-187.655 93.571,-189.306 93.723,-189.459
  other v4: 96.009,-191.491 97.406,-191.491 98.676,-191.491 100.073,-191.491
NetC139_2: C139.2 U51.1 | length 3.3
  Top Layer w0.508: U51.1@91.818,-184.338 93.048,-184.338 93.571,-184.861 C139.2@93.571,-186.155
NetC143_1: C143.1 C144.1 C145.1 F5.1 L1.2 U51.4 | length 16
  Top Layer w0.508: U51.4@88.008,-184.338 88.008,-182.474 89.03,-181.452 L1.2@99.672,-181.452 ; L1.2@98.486,-181.838 ccw(c97.554,-182.77) 97.554,-181.452 ccw(c97.554,-180.134) L1.2@98.486,-181.066
NetC151_1: C151.1 U54.7 | length 6.8
  Top Layer w0.254: U54.7@203.803,-144.835 203.803,-143.771 205.842,-141.732 206.146,-141.732 207.558,-141.732 C151.1@208.371,-140.919
NetC153_1: C153.1 U54.9 X3.1 | length 7.8
  Top Layer w0.254: C153.1@199.481,-140.792 X3.1@202.021,-140.792 202.59,-141.362 202.59,-143.668 202.803,-143.88 U54.9@202.803,-144.835 ; C153.1@199.714,-140.95 cw(c200.094,-141.331) 200.094,-140.792 cw(c200.094,-140.254) C153.1@199.714,-140.635
NetC159_1: C159.1 U54.8 X3.2 | length 9.7
  Top Layer w0.254: X3.2@203.291,-140.809 cw(c202.198,-140.846) 202.971,-141.62 ; U54.8@203.303,-144.835 203.303,-143.842 202.971,-143.51 202.971,-141.62 ; X3.2@203.782,-141.3 ccw(c203.745,-142.393) 202.971,-141.62 ; C159.1@206.106,-140.95 ccw(c205.726,-141.331) 205.726,-140.792 ccw(c205.726,-140.254) C159.1@206.106,-140.635 ; C159.1@206.339,-140.792 X3.2@203.799,-140.792 202.971,-141.62
NetD1_2: D1.2 D12.1 | length 3.5
  Top Layer w0.254: D12.1@212.359,-185.174 D1.2@215.879,-185.174
NetD2_2: D2.2 D3.1 | length 3.5
  Top Layer w0.254: D3.1@212.359,-189 D2.2@215.879,-189
NetD5_2: D5.2 D6.1 | length 3.5
  Top Layer w0.254: D6.1@212.359,-192.826 D5.2@215.879,-192.826
NetD7_2: D7.2 D9.1 | length 3.5
  Top Layer w0.254: D9.1@212.359,-196.652 D7.2@215.879,-196.652
NetD10_2: D10.2 D11.1 | length 3.5
  Top Layer w0.254: D11.1@212.359,-200.478 D10.2@215.879,-200.478
NetD13_2: D13.2 D14.1 | length 3.5
  Top Layer w0.254: D14.1@212.359,-204.304 D13.2@215.879,-204.304
NetD16_2: D16.2 D17.1 | length 3.5
  Top Layer w0.254: D17.1@212.359,-208.13 D16.2@215.879,-208.13
NetD18_2: D18.2 D19.1 | length 3.5
  Top Layer w0.254: D19.1@212.359,-211.956 D18.2@215.879,-211.956
NetD20_2: D20.2 D21.1 | length 4.7
  Top Layer w0.508: D20.2@212.311,-220.497 212.311,-215.83 D21.1@212.359,-215.781
NetD72_1: D72.1 F2.2
NetF3_1: F3.1 P7.1 | length 7.7
  Top Layer w2.032: P7.1@-41.986,-205.664 -41.986,-198.242 F3.1@-41.758,-198.014
NetF4_1: F4.1 R178.2 U49.4 | length 21.4
  Bottom Layer w0.508: U49.4@59.256,-186.284 59.256,-184.556 61.338,-182.474 R178.2@78.076,-182.474
NetF7_1: F7.1 U12.13 | length 6.8
  Top Layer w0.254: F7.1@179.982,-113.284 181.381,-114.684 181.381,-116.942 180.947,-117.376 U12.13@180.947,-118.905 ; U12.13@180.86,-118.068 ccw(c180.65,-117.858) 180.947,-117.858 ccw(c181.244,-117.858) U12.13@181.034,-118.068
NetF8_1: F8.1 U12.12 | length 6.7
  Top Layer w0.254: U12.12@182.13,-118.068 ccw(c181.92,-117.858) 182.217,-117.858 ccw(c182.514,-117.858) U12.12@182.304,-118.068 ; U12.12@182.217,-118.905 182.217,-117.196 181.889,-116.868 181.889,-114.577 F8.1@183.131,-113.335
NetLD1_2: LD1.2 R170.1 | length 3.4
  Top Layer w0.254: R170.1@157.404,-183.007 159.079,-183.007 LD1.2@159.131,-183.059 ; R170.1@157.636,-183.165 cw(c158.017,-183.545) 158.017,-183.007 cw(c158.017,-182.469) R170.1@157.636,-182.849 ; 158.392,-183.007 cw(c158.392,-183.724) LD1.2@158.898,-183.217 ; 158.644,-183.007 ccw(c158.644,-182.647) LD1.2@158.898,-182.902
NetLD3_2: LD3.2 R37.1 | length 3.7
  Top Layer w0.254: R37.1@121.836,-144.09 ccw(c121.455,-143.709) 121.994,-143.709 ccw(c122.532,-143.709) R37.1@122.151,-144.09 ; LD3.2@121.86,-142.523 cw(c121.537,-142.846) 121.994,-142.846 ; R37.1@121.994,-144.323 121.994,-142.315 LD3.2@122.018,-142.291 ; 121.994,-142.962 cw(c122.614,-142.962) LD3.2@122.175,-142.523
NetLED2_1: LED2.1 R184.1 | length 3.8
  Top Layer w0.254: LED2.1@99.746,-131.851 101.792,-131.851 R184.1@101.809,-131.868 ; LED2.1@99.978,-132.009 cw(c100.359,-132.39) 100.359,-131.851 cw(c100.359,-131.313) LED2.1@99.978,-131.694 ; 101.154,-131.851 cw(c101.154,-132.448) R184.1@101.576,-132.026 ; 101.236,-131.851 ccw(c101.236,-131.371) R184.1@101.576,-131.711
NetLED3_1: LED3.1 R105.2 | length 1.7
  Top Layer w0.508: R105.2@168.882,-199.06 LED3.1@168.882,-197.409
NetLED3_2: LED3.2 U11.3 | length 11.5
  Top Layer w0.254: U11.3@164.88,-202.493 ccw(c164.712,-202.66) 164.712,-202.424 ccw(c164.712,-202.187) U11.3@164.88,-202.354 ; U11.3@165.449,-202.424 163.866,-202.424 163.271,-201.828 163.271,-198.552 164.414,-197.409 LED3.2@167.382,-197.409 ; LED3.2@167.224,-197.566 ccw(c166.844,-197.947) 166.844,-197.409 ccw(c166.844,-196.87) LED3.2@167.224,-197.251
NetLED17_1: LED17.1 R102.1 | length 3.9
  Top Layer w0.254: R102.1@61.369,-120.43 LED17.1@63.528,-120.43 ; R102.1@61.602,-120.587 cw(c61.983,-120.968) 61.983,-120.43 cw(c61.983,-119.891) R102.1@61.602,-120.272 ; LED17.1@63.296,-120.587 ccw(c62.915,-120.968) 62.915,-120.43 ccw(c62.915,-119.891) LED17.1@63.296,-120.272
NetLS1_1: LS1.1 R15.2 | length 3
  Bottom Layer w0.254: R15.2@59.935,-111.807 ccw(c59.554,-111.426) 60.092,-111.426 ccw(c60.631,-111.426) R15.2@60.25,-111.807 ; LS1.1@60.068,-109.88 60.092,-109.904 R15.2@60.092,-112.039
NetLS1_2: LS1.2 Q1.3 | length 4.9
  Top Layer w0.254: LS1.2@65.068,-109.88 69.29,-109.88 Q1.3@69.306,-109.896 ; 68.65,-109.88 cw(c68.65,-110.353) Q1.3@68.983,-110.019 ; 68.727,-109.88 ccw(c68.727,-109.517) Q1.3@68.983,-109.774
NetP2_2: P2.2 R23.2 R24.1 | length 6.3
  Top Layer w0.254: R23.2@193.16,-214.278 cw(c192.78,-214.659) 193.318,-214.659 cw(c193.856,-214.659) R23.2@193.476,-214.278 ; R23.2@193.16,-213.813 ccw(c192.776,-213.429) 193.319,-213.429 ; R24.1@193.162,-212.754 cw(c192.781,-213.135) 193.319,-213.135 cw(c193.858,-213.135) R24.1@193.477,-212.754 ; P2.2@193.294,-216.306 193.318,-216.282 R23.2@193.318,-214.046 193.319,-214.044 R24.1@193.319,-212.522 ; 193.319,-213.436 ccw(c193.853,-213.436) R23.2@193.476,-213.813
NetP4_1: P4.1 R39.2 | length 11.5
  Top Layer w0.254: R39.2@214.07,-136.398 215.111,-135.357 218.872,-135.357 219.685,-134.544 219.685,-132.232 220.523,-131.394 P4.1@222.174,-131.394
NetP6_1: P6.1 U13.6 | length 15.3
  Top Layer w0.254: U13.6@143.528,-136.116 ccw(c143.19,-135.778) 143.668,-135.778 ccw(c144.146,-135.778) U13.6@143.808,-136.116 ; v1@143.578,-134.994 cw(c143.361,-135.211) 143.668,-135.211 cw(c143.974,-135.211) v1@143.757,-134.994 ; U13.6@143.668,-137.081 v1(143.668,-134.905)
  Bottom Layer w0.254: v1(143.668,-134.905) 147.086,-134.905 148.892,-133.099 P6.1@148.892,-127.711 ; v1@143.757,-134.994 cw(c143.974,-135.211) 143.974,-134.905 cw(c143.974,-134.598) v1@143.757,-134.815
NetP6_2: P6.2 R161.1 | length 4
  Top Layer w0.254: P6.2@148.892,-125.171 R161.1@152.093,-125.171 ; R161.1@151.86,-125.329 ccw(c151.479,-125.71) 151.479,-125.171 ccw(c151.479,-124.633) R161.1@151.86,-125.014
NetP21_4: P21.4 R167.2 | length 6.6
  Top Layer w0.254: R167.2@91.781,-107.554 ccw(c91.275,-107.049) 91.991,-107.049 ; R167.2@91.991,-107.7 P21.4@91.991,-102.108 ; 91.991,-107.193 ccw(c92.502,-107.193) R167.2@92.14,-107.554
NetP21_5: P21.5 R21.2 | length 6.5
  Top Layer w0.254: R21.2@89.797,-107.58 ccw(c89.331,-107.113) 89.991,-107.113 ; R21.2@89.991,-107.682 P21.5@89.991,-102.108 ; 89.991,-107.179 ccw(c90.557,-107.179) R21.2@90.157,-107.58
NetQ1_1: Q1.1 R16.1 R172.1 | length 7.8
  Top Layer w0.254: Q1.1@71.806,-110.896 R16.1@74.422,-110.896 R172.1@74.422,-108.864 ; Q1.1@72.128,-111.019 cw(c72.423,-111.314) 72.423,-110.896 cw(c72.423,-110.479) Q1.1@72.128,-110.774 ; R16.1@74.264,-111.054 ccw(c73.884,-111.435) 73.884,-110.896 ccw(c73.884,-110.358) R16.1@74.264,-110.739 ; R16.1@74.264,-110.664 ccw(c73.884,-110.283) 74.422,-110.283 ccw(c74.96,-110.283) R16.1@74.58,-110.664 ; R172.1@74.264,-109.097 cw(c73.884,-109.478) 74.422,-109.478 cw(c74.96,-109.478) R172.1@74.58,-109.097
NetQ3_1: Q3.1 R162.2 R163.2 | length 6.6
  Top Layer w0.254: R163.2@143.402,-125.251 cw(c143.021,-125.632) 143.56,-125.632 cw(c144.098,-125.632) R163.2@143.717,-125.251 ; R163.2@143.402,-124.786 ccw(c143.021,-124.405) 143.56,-124.405 ccw(c144.098,-124.405) R163.2@143.717,-124.786 ; R162.2@143.402,-123.6 cw(c143.021,-123.981) 143.56,-123.981 cw(c144.098,-123.981) R162.2@143.717,-123.6 ; Q3.1@143.461,-126.474 ccw(c143.224,-126.237) 143.56,-126.237 ; Q3.1@143.56,-126.773 R163.2@143.56,-125.019 R162.2@143.56,-123.368 ; 143.56,-126.121 ccw(c144.059,-126.121) Q3.1@143.706,-126.474
NetQ3_3: Q3.3 U13.7 | length 9.2
  Top Layer w0.254: U13.7@142.428,-136.116 ccw(c142.051,-135.739) 142.584,-135.739 ; Q3.3@142.461,-129.619 cw(c142.166,-129.914) 142.584,-129.914 cw(c143.001,-129.914) Q3.3@142.706,-129.619 ; U13.7@142.568,-137.081 142.584,-137.065 Q3.3@142.584,-129.297 ; 142.584,-135.816 ccw(c143.007,-135.816) U13.7@142.708,-136.116
NetQ4_1: Q4.1 R164.2 | length 3.5
  Top Layer w0.254: Q4.1@125.912,-142.829 ccw(c125.617,-142.534) 126.035,-142.534 ccw(c126.452,-142.534) Q4.1@126.157,-142.829 ; R164.2@125.924,-141.126 cw(c125.656,-141.394) 126.035,-141.394 ; Q4.1@126.035,-142.951 R164.2@126.035,-140.941 ; 126.035,-141.62 cw(c126.733,-141.62) R164.2@126.239,-141.126
NetQ4_3: Q4.3 R37.2 | length 6.7
  Top Layer w0.254: R37.2@123.494,-144.323 124.587,-144.323 124.959,-143.951 Q4.3@128.535,-143.951 ; R37.2@123.651,-144.48 cw(c124.032,-144.861) 124.032,-144.323 cw(c124.032,-143.784) R37.2@123.651,-144.165 ; Q4.3@128.212,-144.074 ccw(c127.917,-144.369) 127.917,-143.951 ccw(c127.917,-143.534) Q4.3@128.212,-143.829
NetQ5_1: Q5.1 R165.2 R166.2 | length 6.6
  Top Layer w0.254: R166.2@124.225,-136.978 ccw(c123.844,-136.597) 124.383,-136.597 ccw(c124.921,-136.597) R166.2@124.54,-136.978 ; R165.2@124.225,-135.665 cw(c123.844,-136.046) 124.383,-136.046 cw(c124.921,-136.046) R165.2@124.54,-135.665 ; R166.2@124.383,-137.211 R165.2@124.383,-135.433 Q5.1@126.058,-135.433 ; R165.2@124.54,-135.59 cw(c124.921,-135.971) 124.921,-135.433 cw(c124.921,-134.894) R165.2@124.54,-135.275 ; Q5.1@125.735,-135.555 ccw(c125.44,-135.85) 125.44,-135.433 ccw(c125.44,-135.015) Q5.1@125.735,-135.31
NetQ5_3: Q5.3 U13.15 | length 10.1
  Top Layer w0.254: Q5.3@128.435,-136.555 cw(c128.14,-136.85) 128.558,-136.85 cw(c128.975,-136.85) Q5.3@128.68,-136.555 ; Q5.3@128.558,-136.433 128.558,-138.616 131.472,-141.531 U13.15@133.868,-141.531 ; U13.15@132.903,-141.671 ccw(c132.565,-142.009) 132.565,-141.531 ccw(c132.565,-141.053) U13.15@132.903,-141.391
NetQ6_1: Q6.1 R171.2 | length 3.6
  Top Layer w0.254: R171.2@151.054,-181.329 Q6.1@153.11,-181.329 ; R171.2@151.286,-181.487 cw(c151.667,-181.868) 151.667,-181.329 cw(c151.667,-180.791) R171.2@151.286,-181.172 ; 152.49,-181.329 cw(c152.49,-181.752) Q6.1@152.789,-181.453 ; 152.497,-181.329 ccw(c152.497,-180.916) Q6.1@152.789,-181.208
NetQ6_3: Q6.3 R170.2 | length 3.9
  Top Layer w0.254: Q6.3@155.489,-182.208 ccw(c155.194,-181.913) 155.611,-181.913 ccw(c156.029,-181.913) Q6.3@155.734,-182.208 ; Q6.3@155.611,-182.331 155.611,-181.802 155.907,-181.507 R170.2@157.404,-181.507 ; R170.2@157.171,-181.665 ccw(c156.79,-182.045) 156.79,-181.507 ccw(c156.79,-180.969) R170.2@157.171,-181.349
NetR5_1: R5.1 R6.2 | length 5
  Top Layer w0.254: R6.2@200.625,-189 R5.1@202.816,-189 ; R6.2@200.889,-189.264 cw(c201.526,-189.901) 201.526,-189 cw(c201.526,-188.1) R6.2@200.889,-188.737 ; R5.1@202.553,-189.264 ccw(c201.916,-189.901) 201.916,-189 ccw(c201.916,-188.1) R5.1@202.553,-188.737
NetR9_1: R9.1 USB.3 | length 4.5
  Top Layer w0.254: R9.1@142.753,-107.971 ccw(c142.457,-107.675) 142.875,-107.675 ccw(c143.293,-107.675) R9.1@142.997,-107.971 ; R9.1@142.875,-108.093 142.875,-107.417 143.135,-107.157 USB.3@143.135,-104.326